# Altium PCB PCB_LED.PcbDoc
Units mm, origin at the board's own origin, x right, y up, seen from the top; angles counter-clockwise.
Board outline 52 x 52 mm, 2 copper layers (Top Layer, Bottom Layer); 7 components, 6 nets, 16 pads, 0 vias.
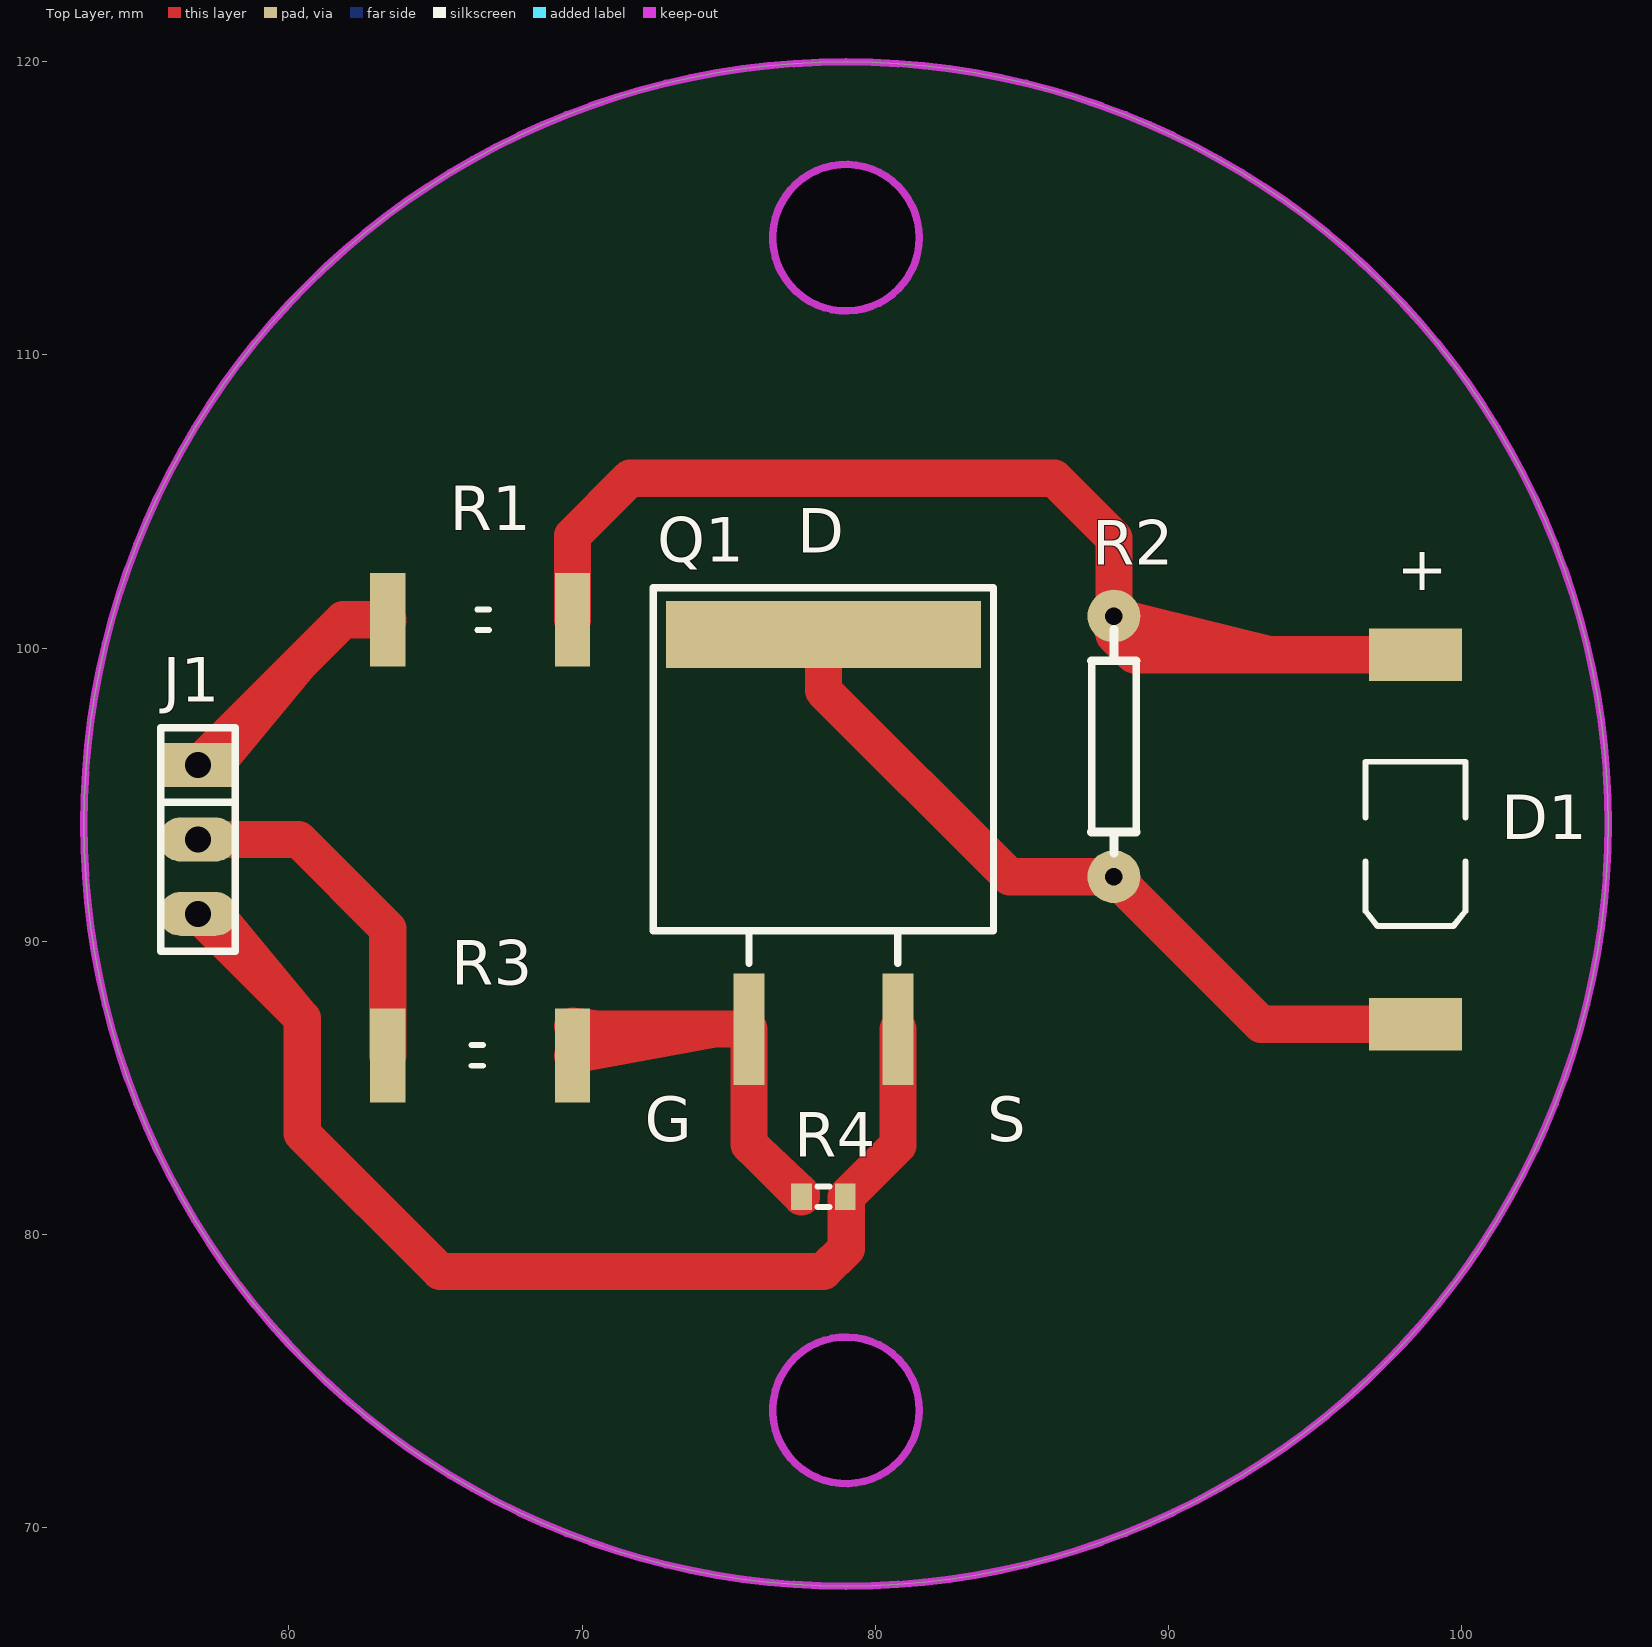
[diagram p0: Top Layer view]
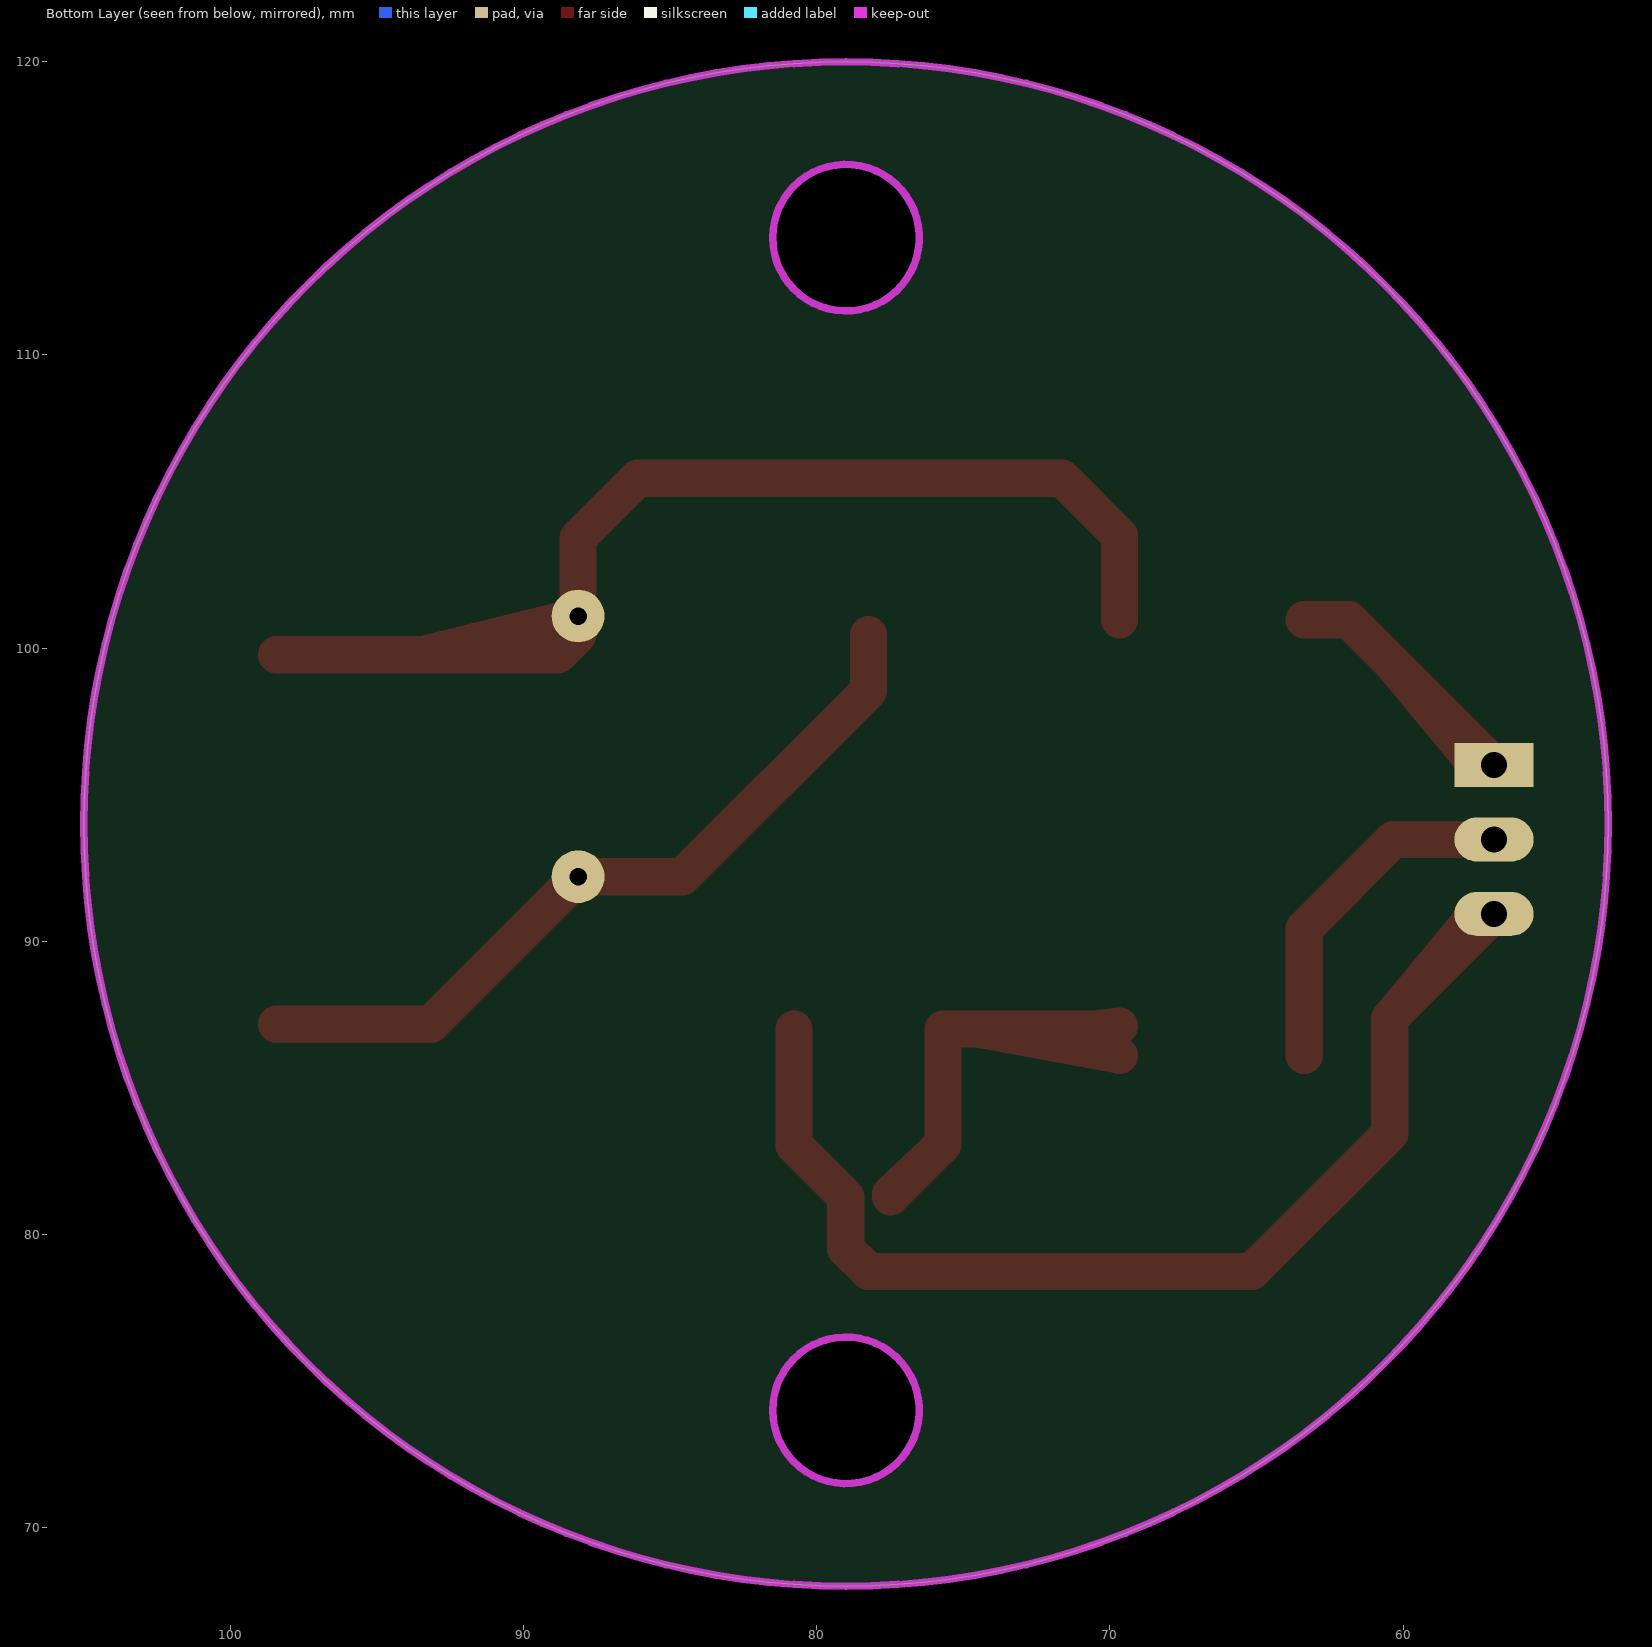
[diagram p1: Bottom Layer view, seen from below]

## Layer stack, top to bottom
Top Layer: signal copper 0.0356
Dielectric: dielectric 0.32, FR-4, Dk 4.8
Bottom Layer: signal copper 0.0356

## Board outline
79,68 cw(c79,94) 53,94 cw(c79,94) 79,120 cw(c79,94) 105,94 cw(c79,94)
cut-out: 76.5,74 ccw(c79,74) 79,71.5 ccw(c79,74) 81.5,74 ccw(c79,74) 79,76.5 ccw(c79,74)
cut-out: 79,111.5 cw(c79,114) 76.5,114 cw(c79,114) 79,116.5 cw(c79,114) 81.5,114 cw(c79,114)

## Design rules (kind name [scope] priority, off if disabled: settings)
Clearance [All] p1: gap=0.254
PolygonConnect [All] p1: connectstyle=Relief reliefconductorwidth=0.254 reliefentries=4 polygonreliefangle="90 Angle" airgapwidth=0.254
RoutingVias [All] p1: holewidth=0.711 width=1.27 viastyle="Through Hole" minholewidth=0.711 minwidth=1.27 maxholewidth=0.711 maxwidth=1.27
SolderMaskExpansion [All] p1: expansion=0.102
Width [All] p1: maxlimit=2.032 minlimit=0.254 preferedwidth=1.27 bottomlayer_maxwidth=0.254 bottomlayer_prefwidth=0.254 minimp=50.000000 maximp=50.000000 favimp=50.000000
28 further rules are at their usual default settings.

## Classes and differential pairs
component class 原理图: J1 Q1 R2 R4

## Components (designator, comment, footprint, x,y, rotation, side; value= is the part's Value field where it differs from the comment)
D1 "LED3" 3.5X2.8X1.9 98.425,93.472 r270 top
J1 "CON3" SIP-3 56.896,96.012 r270 top
Q1 "IRF540S" TO-263-2 78.232,97.155 r0 top
R1 "12" J1-0603#1 66.621,100.965 r180 top (schematic designator R3)
R2 "Res" AXIAL0.3 88.138,92.202 r90 top
R3 "12" J1-0603#1 66.421,86.106 r0 top
R4 "10k" J1-0603#2 78.232,81.28 r180 top

## Footprints (in the part's own frame and the unit in brackets; to place one, negate y for a bottom-side part, rotate by r counter-clockwise, add the part's x,y. Pads: shape width x height; smd on the part's side, far side on the other; paste and mask are expansions set on the pad)
3.5X2.8X1.9 [mm] "SM LED; 2 C-Bend Leads; Body 3.5 x 2.8 x 1.9 mm, inc leads (LxWxH typ)"
  rect 1.8x3.175 smd: 1(-6.3,0) 2(6.3,0)
  silkscreen extent -2.65,-1.7 2.95,1.7
AXIAL0.3 [mm]
  round 1.8 hole 0.6: 1(0,0) 2(8.89,0)
  silkscreen extent 0.81,-0.76 8.43,0.76
J1-0603#1 [mm] "Chip Resistor, Body 1.6x0.8mm, IPC High Density"
  rect 1.2x3.2 smd: 1(-3.05,0) 2(3.25,0)
  silkscreen extent -0.2,-0.35 0.2,0.35, body extent -0.85,-0.48 0.85,0.48, height 0.9
J1-0603#2 [mm] "Chip Resistor, Body 1.6x0.8mm, IPC High Density"
  rect 0.7x0.9 smd: 1(-0.75,0) 2(0.75,0)
  silkscreen extent -0.2,-0.35 0.2,0.35, body extent -0.85,-0.48 0.85,0.48, height 0.9
SIP-3 [mm]
  rect 1.5x2.7 hole 0.9: 1(0,0)
  oval 1.5x2.7 hole 0.9: 2(2.54,0) 3(5.08,0)
  silkscreen extent -1.27,-1.27 6.35,1.27
TO-263-2 [mm] "TO-263, D2PAK, 2PIN"
  rect 1.05x3.8 smd: 1(-2.54,-10.15) 3(2.54,-10.15)
  rect 10.75x2.286 smd: 4(0,3.302)
  silkscreen extent -5.8,-7.9 5.8,4.9, body extent -5.08,-11.39 5.08,3.87, height 5.01

## Part data
D1: "Typical BLUE SiC LED"
J1: "SOCKET"
Q1: "N-Channel MOSFET"
R1 R3 R4: library part Res3, "Resistor"

## Nets (pads, with @x,y where several pads share a name; then routed paths per layer and width w, separated by ;. In a path a pad name is that pad's centre, name@x,y a point inside that pad or via, vN(x,y) a via of type N, cw(c..) or ccw(c..) an arc to the next point about the centre after c; other vN are vias at no path point)
GND: J1.3 Q1.3 R4.1 | length 45.1
  Top Layer w1.27: J1.3 60.452,87.376 60.452,83.439 65.151,78.74 78.232,78.74 79.006,79.514 79.006,81.28 80.772,83.046 ; J1.3@57.496,90.932 60.34,87.488 ; Q1.3@80.772,85.63 80.772,83.046 ; Q1.3 80.772,83.046
NetD1_1: D1.1 R1.1 R2.2 | length 51.9
  Top Layer w1.27: R1.1 69.671,103.834 ; R1.1@69.671,101.965 69.671,103.834 ; 93.115,99.772 D1.1@97.825,99.772 ; 93.452,99.772 R2.2 ; D1.1 88.823,99.772 ; 69.671,103.834 71.628,105.791 86.106,105.791 88.138,103.759 R2.2 ; R2.2 88.823,99.772 ; R2.2 88.823,99.772 ; R2.2 88.138,100.457 88.823,99.772
NetD1_2: D1.2 Q1.4 R2.1 | length 36.9
  Top Layer w1.27: D1.2@97.825,87.172 93.168,87.172 ; D1.2 93.168,87.172 ; 78.232,98.552 Q1.4 78.232,98.552 ; 78.232,98.552 84.582,92.202 ; 84.582,92.202 R2.1 ; 84.582,92.202 R2.1 ; R2.1 93.168,87.172
NetJ1_2: J1.2 R3.1 | length 18.2
  Top Layer w1.27: J1.2 60.325,93.472 ; J1.2@57.496,93.472 60.325,93.472 ; R3.1 63.371,90.426 ; R3.1@63.371,87.106 63.371,90.426 ; 60.325,93.472 63.371,90.426
NetQ1_2: Q1.1 R3.2 R4.2 | length 28.9
  Top Layer w1.27: 71.357,87.005 Q1.1 ; 74.489,87.005 R3.2 70.57,87.005 ; Q1.1@75.692,85.63 75.692,83.07 ; R4.2 75.692,83.07 ; R4.2@77.482,81.38 75.692,83.07 ; 70.57,87.005 69.671,87.106 70.57,87.005 ; 70.57,87.005 Q1.1 ; 75.692,83.07 Q1.1
VCC: J1.1 R1.2 | length 14.5
  Top Layer w1.27: J1.1 61.849,100.965 ; J1.1@57.496,96.012 60.34,99.456 ; 61.849,100.965 R1.2 61.849,100.965

## Keep-outs
Keep-Out Layer:
  circle w0.254: c79,74 r2.5
  circle w0.254: c79,114 r2.5
  circle w0.254: c79,94 r26

## Silkscreen, mask and mechanical layers (free items; w line width, h text height)
Top Overlay:
  text "D" at 77.343,103.251 h1.52
  text "+" at 97.79,101.981 h1.52
  text "G" at 72.136,83.185 h1.52
  text "S" at 83.82,83.185 h1.52